# Altium PCB BMW E34T Rear Lights.PcbDoc
Units mil, origin at the board's own origin, x right, y up, seen from the top; angles counter-clockwise.
Board outline 6000 x 4000 mil, 2 copper layers (Top Layer, Bottom Layer); 9 components, 0 nets, 36 pads, 72 vias.
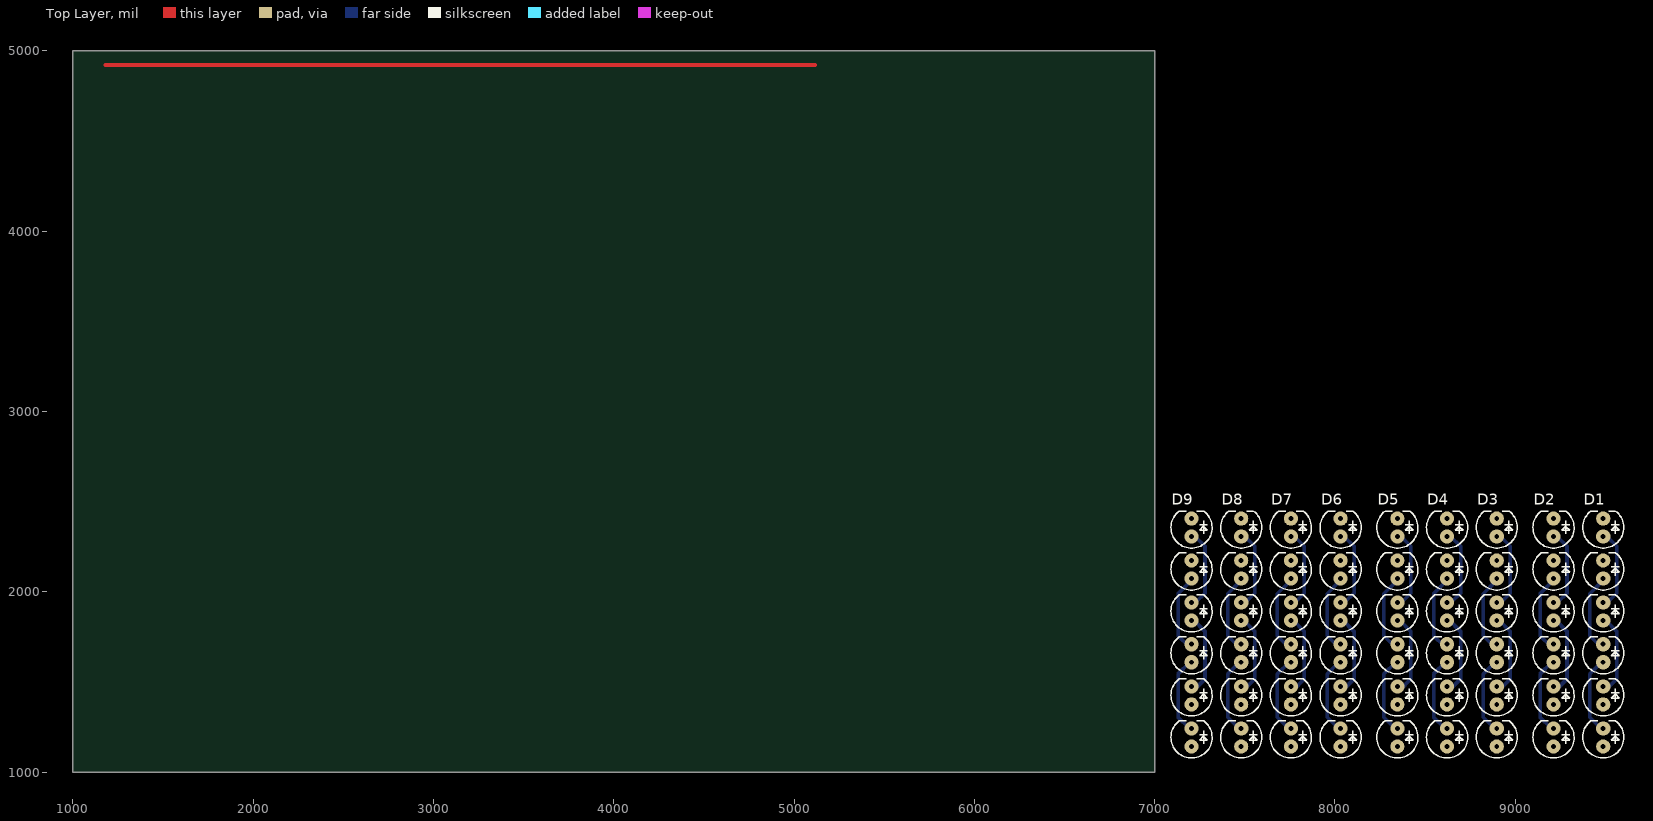
[diagram p0: Top Layer view]
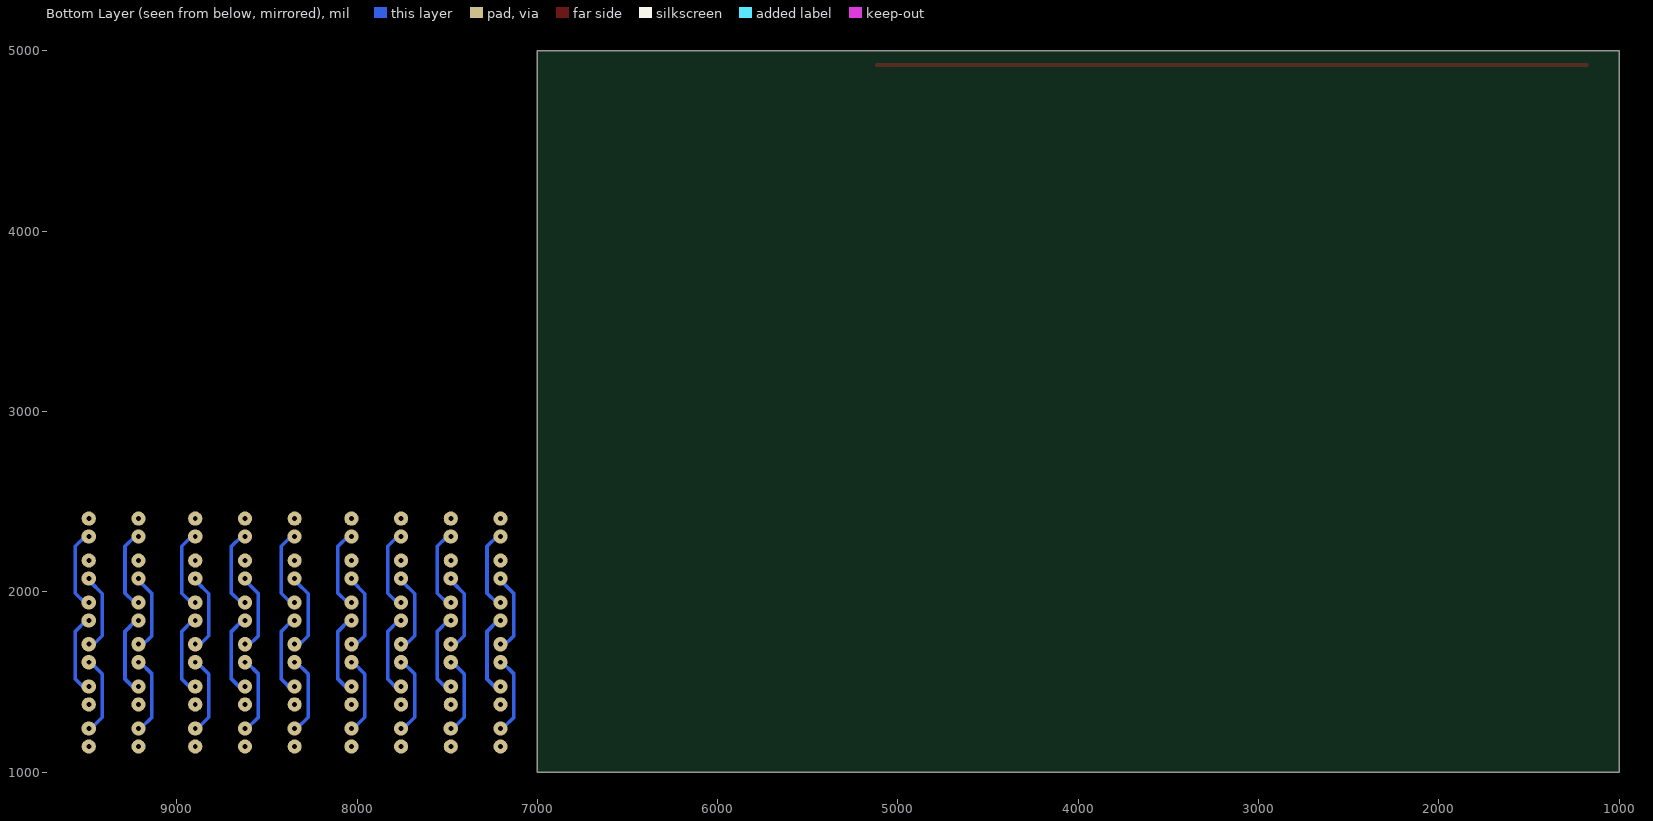
[diagram p1: Bottom Layer view, seen from below]

## Layer stack, top to bottom
Top Solder: solder mask 0.4, Solder Resist, Dk 3.5
Top Layer: signal copper 1.4
Dielectric 1: dielectric 12.6, FR-4, Dk 4.8
Bottom Layer: signal copper 1.4
Bottom Solder: solder mask 0.4, Solder Resist, Dk 3.5

## Board outline
1000,1000 7000,1000 7000,5000 1000,5000

## Design rules (kind name [scope] priority, off if disabled: settings)
Clearance [All] p1: gap=10
PolygonConnect [All] p1: connectstyle=Relief reliefconductorwidth=10 reliefentries=4 polygonreliefangle="90 Angle" airgapwidth=10
RoutingVias [All] p1: holewidth=28 width=50 viastyle="Through Hole" minholewidth=28 minwidth=50 maxholewidth=28 maxwidth=50
SolderMaskExpansion [All] p1: expansion=4
Width [All] p1: maxlimit=10 minlimit=10 preferedwidth=10
29 further rules are at their usual default settings.

## Components (designator, comment, footprint, x,y, rotation, side; value= is the part's Value field where it differs from the comment)
D1 "White" "LED Assembly Round 5mm White 6X 0.5mm" 9488.19,1141.73 r90 top
D2 "White" "LED Assembly Round 5mm White 6X 0.5mm" 9212.6,1141.73 r90 top
D3 "White" "LED Assembly Round 5mm White 6X 0.5mm" 8897.64,1141.73 r90 top
D4 "White" "LED Assembly Round 5mm White 6X 0.5mm" 8622.05,1141.73 r90 top
D5 "White" "LED Assembly Round 5mm White 6X 0.5mm" 8346.46,1141.73 r90 top
D6 "White" "LED Assembly Round 5mm White 6X 0.5mm" 8031.5,1141.73 r90 top
D7 "White" "LED Assembly Round 5mm White 6X 0.5mm" 7755.91,1141.73 r90 top
D8 "White" "LED Assembly Round 5mm White 6X 0.5mm" 7480.32,1141.73 r90 top
D9 "White" "LED Assembly Round 5mm White 6X 0.5mm" 7204.73,1141.73 r90 top

## Footprints (in the part's own frame and the unit in brackets; to place one, negate y for a bottom-side part, rotate by r counter-clockwise, add the part's x,y. Pads: shape width x height; smd on the part's side, far side on the other; paste and mask are expansions set on the pad)
"LED Assembly Round 5mm White 6X 0.5mm" [mm] "Assembly 6X in one line, distance 0.5mm"
  round 2 hole 0.7: A1(0,0) A2(5.92,0) K1(26.2,0) K2(32.1,0)
  Bottom Layer lines w0.5: 14.1,0.4 15.6,1.9 21.5,1.9 23.16,0.24 ; 14.4,0.4 14.4,0 ; 23.66,0.24 23.66,0 ; 2.54,0 2.54,0.34 4.1,1.9 10.2,1.9 11.86,0.24 11.86,0 ; 8.46,0 8.46,-0.36 ; 17.76,0 17.76,-0.34 16.2,-1.9 9.5,-1.9 7.96,-0.36 ; 20.3,0 20.3,-0.6 21.6,-1.9 28.2,-1.9 29.56,-0.54 29.56,0
  silkscreen extent -1.62,-2.9 33.16,2.9, body extent -1.71,-3.01 33.27,3.01, height 9.31

## Part data
D1 D2 D3 D4 D5 D6 D7 D8 D9: library part "Led Assembly Round 5mm White 6X", "3.2-3.4v 25mA, 16-20cd"

## Via types
v1: diameter 78.74, hole 27.56, Top Layer to Bottom Layer, 72 vias

## Nets (pads, with @x,y where several pads share a name; then routed paths per layer and width w, separated by ;. In a path a pad name is that pad's centre, name@x,y a point inside that pad or via, vN(x,y) a via of type N, cw(c..) or ccw(c..) an arc to the next point about the centre after c; other vN are vias at no path point)
pads on no net: D1.A1 D1.A2 D1.K1 D1.K2 D2.A1 D2.A2 D2.K1 D2.K2 D3.A1 D3.A2 D3.K1 D3.K2 D4.A1 D4.A2 D4.K1 D4.K2 D5.A1 D5.A2 D5.K1 D5.K2 D6.A1 D6.A2 D6.K1 D6.K2 D7.A1 D7.A2 D7.K1 D7.K2 D8.A1 D8.A2 D8.K1 D8.K2 D9.A1 D9.A2 D9.K1 D9.K2
copper on no net: | length 3937
  Top Layer w19.68: 1181.1,4921.26 5118.11,4921.26
  other v1: 7204.73,1241.73 7480.32,1241.73 7755.91,1241.73 8031.5,1241.73 8346.46,1241.73 8622.05,1241.73 8897.64,1241.73 9212.6,1241.73 9488.19,1241.73 7204.73,1474.8 7480.32,1474.8 7755.91,1474.8 8031.5,1474.8 8346.46,1474.8 8622.05,1474.8 8897.64,1474.8 9212.6,1474.8 9488.19,1474.8 7204.73,1608.66 7480.32,1608.66 7755.91,1608.66 8031.5,1608.66 8346.46,1608.66 8622.05,1608.66 8897.64,1608.66 9212.6,1608.66 9488.19,1608.66 7204.73,1708.66 7480.32,1708.66 7755.91,1708.66 8031.5,1708.66 8346.46,1708.66 8622.05,1708.66 8897.64,1708.66 9212.6,1708.66 9488.19,1708.66 7204.73,1840.95 7480.32,1840.95 7755.91,1840.95 8031.5,1840.95 8346.46,1840.95 8622.05,1840.95 8897.64,1840.95 9212.6,1840.95 9488.19,1840.95 7204.73,1940.95 7480.32,1940.95 7755.91,1940.95 8031.5,1940.95 8346.46,1940.95 8622.05,1940.95 8897.64,1940.95 9212.6,1940.95 9488.19,1940.95 7204.73,2073.23 7480.32,2073.23 7755.91,2073.23 8031.5,2073.23 8346.46,2073.23 8622.05,2073.23 8897.64,2073.23 9212.6,2073.23 9488.19,2073.23 7204.73,2305.51 7480.32,2305.51 7755.91,2305.51 8031.5,2305.51 8346.46,2305.51 8622.05,2305.51 8897.64,2305.51 9212.6,2305.51 9488.19,2305.51